# Altium PCB Coil_v3r1.PcbDoc (part 3 of 5)
Units mm, origin at the board's own origin, x right, y up, seen from the top; angles counter-clockwise.
Board outline 72 x 72 mm, 4 copper layers (Top Layer, Signal Layer 1, Signal Layer 2, Bottom Layer), stack 0.778 mm thick; 2 components, 0 nets, 15 pads, 374 vias.
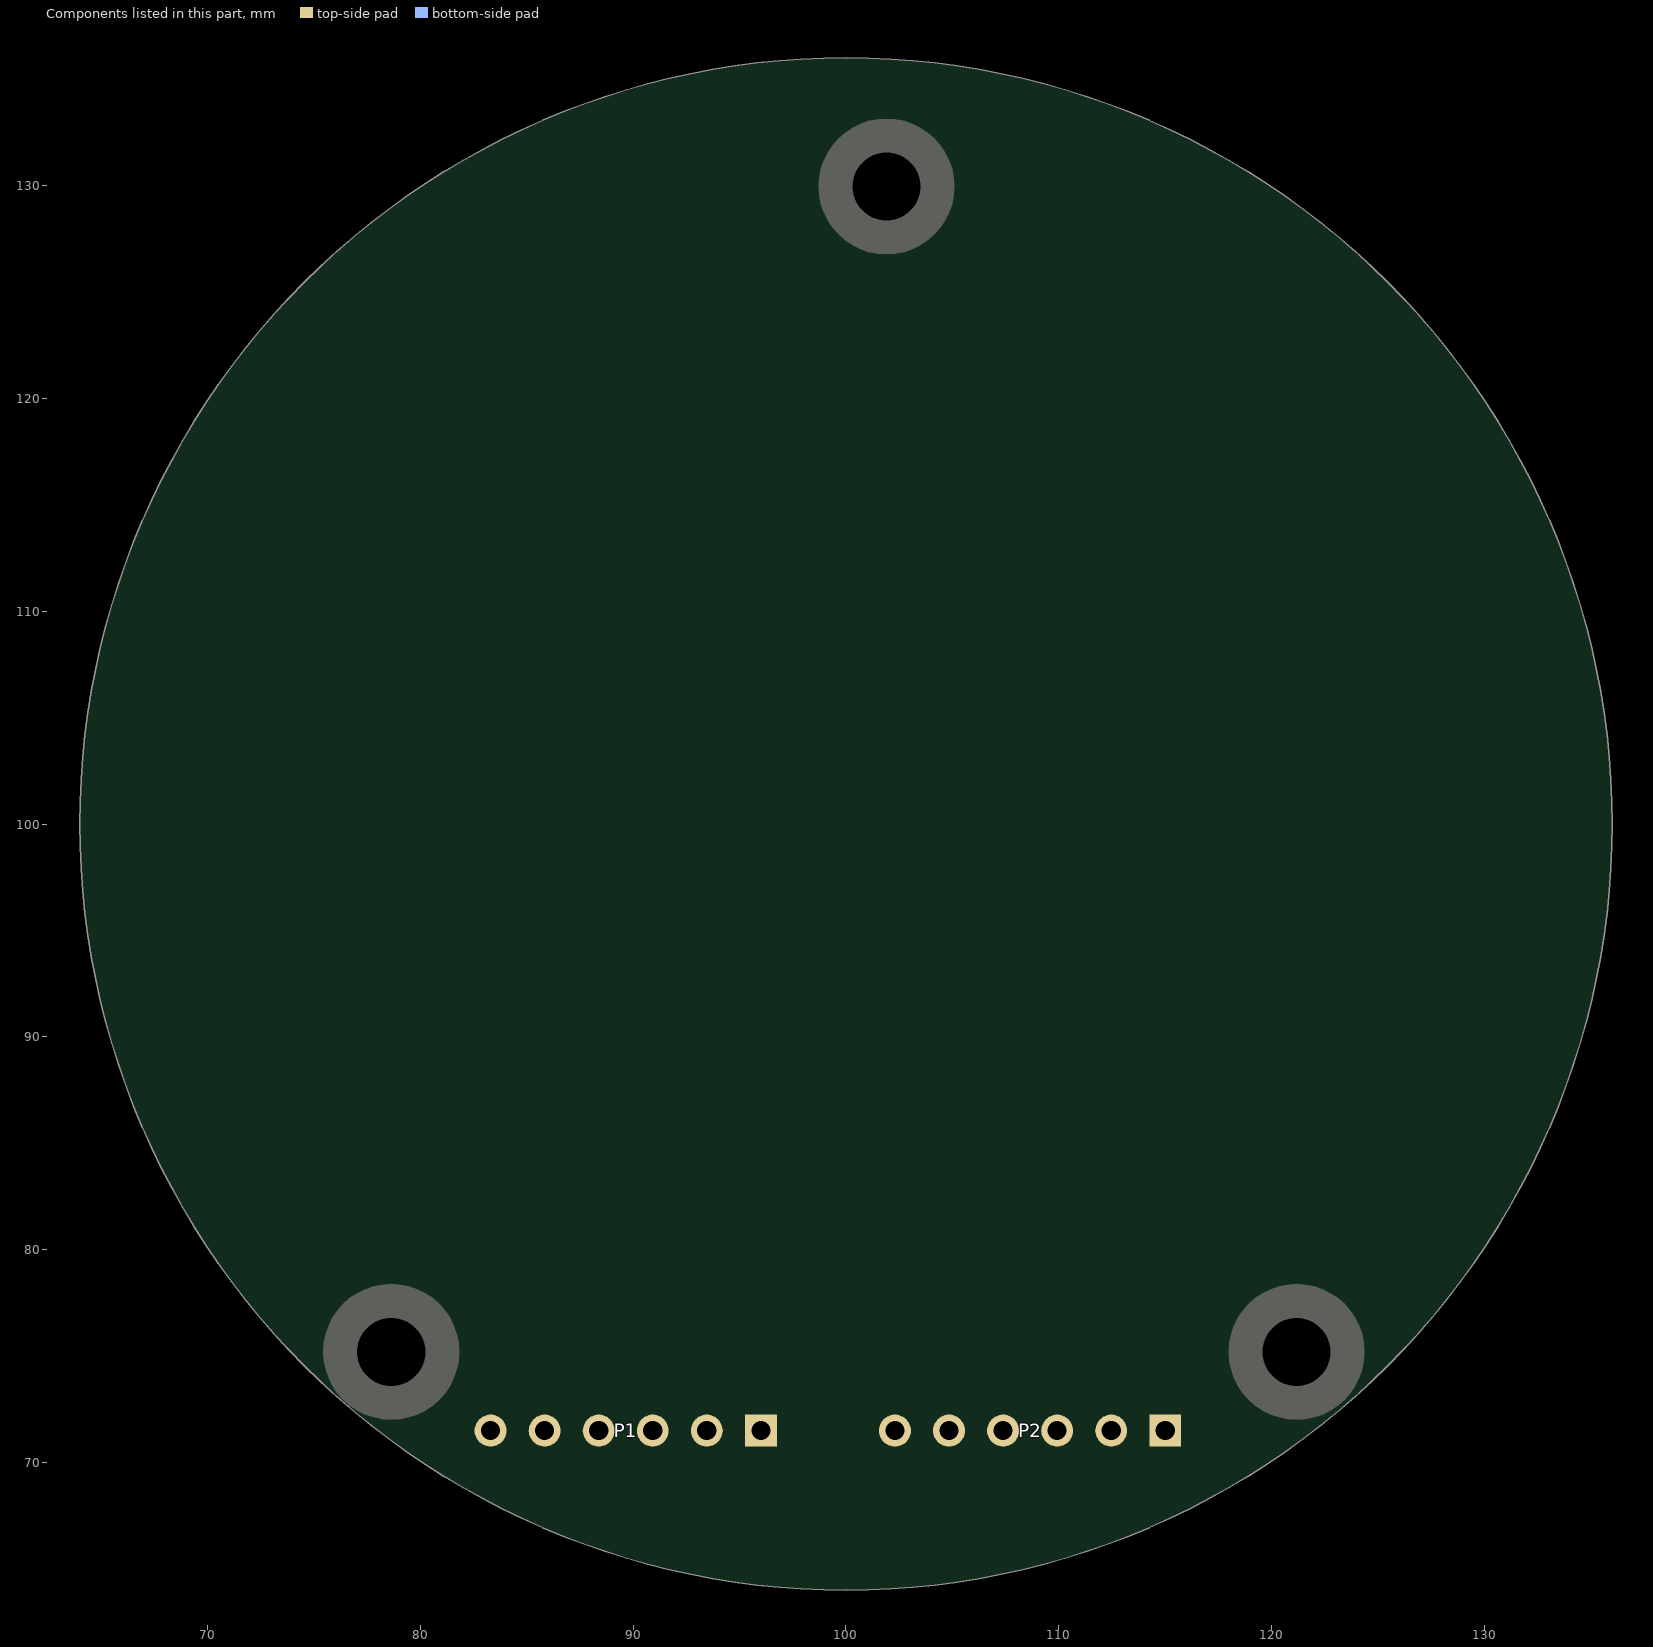
[diagram p5: the components of this part, seen from the top]

## Via types
v1: diameter 0.406, hole 0.305, Top Layer to Bottom Layer, 374 vias

## Nets (pads, with @x,y where several pads share a name; then routed paths per layer and width w, separated by ;. In a path a pad name is that pad's centre, name@x,y a point inside that pad or via, vN(x,y) a via of type N, cw(c..) or ccw(c..) an arc to the next point about the centre after c; other vN are vias at no path point) (continued)
copper on no net: (continued)
  Signal Layer 1 w0.1: v1(107.244,101.941) 107.247,101.996 107.282,102.061 107.349,102.135 107.446,102.22 107.573,102.315 107.726,102.421 107.905,102.538 108.107,102.665 108.329,102.803 108.569,102.95 108.823,103.107 109.088,103.272 109.362,103.444 109.64,103.623 109.919,103.808 110.197,103.996 110.468,104.187 110.731,104.379 110.983,104.572 111.219,104.762 111.437,104.949 111.635,105.131 111.81,105.307 111.959,105.475 112.082,105.634 112.177,105.782 112.242,105.918 112.276,106.041 112.279,106.149 v1(112.251,106.242) ; v1(107.408,98.827) 107.433,98.876 107.491,98.921 107.582,98.961 107.705,98.999 107.86,99.035 108.043,99.069 108.254,99.103 108.49,99.138 108.749,99.173 109.028,99.21 109.324,99.25 109.633,99.293 109.953,99.339 110.28,99.389 110.61,99.444 110.94,99.503 111.266,99.567 111.585,99.636 111.893,99.709 112.186,99.787 112.461,99.87 112.716,99.956 112.947,100.045 113.152,100.138 113.329,100.233 113.476,100.329 113.59,100.427 113.672,100.525 113.719,100.623 v1(113.731,100.72) ; v1(107.408,101.173) 107.416,101.228 107.458,101.288 107.532,101.355 107.638,101.429 107.773,101.511 107.937,101.6 108.127,101.698 108.341,101.803 108.577,101.917 108.83,102.039 109.099,102.168 109.38,102.304 109.67,102.447 109.966,102.596 110.263,102.75 110.558,102.908 110.849,103.07 111.13,103.234 111.4,103.399 111.655,103.563 111.892,103.727 112.107,103.887 112.3,104.044 112.466,104.195 112.605,104.34 112.714,104.477 112.793,104.606 112.84,104.724 112.855,104.832 v1(112.837,104.928) ; v1(107.482,84.18) 107.593,84.214 107.72,84.216 107.862,84.189 108.02,84.133 108.193,84.049 108.383,83.94 108.587,83.808 108.806,83.654 109.039,83.482 109.284,83.294 109.541,83.093 109.808,82.882 110.084,82.665 110.367,82.444 110.655,82.224 110.946,82.006 111.239,81.794 111.531,81.592 111.82,81.402 112.105,81.226 112.382,81.069 112.651,80.932 112.909,80.817 113.154,80.727 113.384,80.662 113.598,80.625 113.795,80.615 113.973,80.635 114.13,80.684 v1(114.267,80.763) ; v1(107.49,99.607) 107.509,99.659 107.563,99.709 107.649,99.76 107.768,99.81 107.917,99.862 108.096,99.915 108.303,99.971 108.534,100.03 108.788,100.092 109.061,100.158 109.351,100.229 109.655,100.303 109.968,100.383 110.288,100.467 110.61,100.556 110.932,100.65 111.25,100.747 111.56,100.849 111.858,100.954 112.141,101.062 112.407,101.173 112.651,101.285 112.872,101.398 113.066,101.512 113.232,101.625 113.368,101.736 113.471,101.845 113.542,101.951 113.578,102.054 v1(113.581,102.151) ; v1(107.49,100.393) 107.504,100.446 107.552,100.502 107.632,100.56 107.745,100.623 107.889,100.69 108.061,100.762 108.26,100.839 108.484,100.922 108.73,101.01 108.995,101.104 109.276,101.205 109.57,101.311 109.873,101.423 110.183,101.54 110.494,101.662 110.805,101.789 111.11,101.919 111.407,102.053 111.693,102.188 111.964,102.325 112.216,102.463 112.447,102.6 112.655,102.736 112.836,102.869 112.99,102.999 113.113,103.124 113.205,103.243 113.264,103.356 113.289,103.462 v1(113.281,103.559) ; v1(108.069,122.55) 108.21,122.48 108.338,122.376 108.454,122.24 108.555,122.071 108.643,121.872 108.717,121.645 108.778,121.39 108.826,121.112 108.861,120.813 108.885,120.495 108.897,120.161 108.9,119.815 108.894,119.459 108.88,119.098 108.861,118.735 108.837,118.373 108.811,118.015 108.784,117.665 108.757,117.326 108.733,117.001 108.713,116.692 108.699,116.403 108.693,116.136 108.696,115.892 108.711,115.674 108.738,115.483 108.779,115.321 108.835,115.188 108.907,115.084 v1(108.997,115.01) ; v1(108.997,84.99) 109.104,85.034 109.23,85.049 109.374,85.036 109.536,84.995 109.717,84.929 109.916,84.839 110.133,84.727 110.366,84.596 110.614,84.447 110.877,84.284 111.152,84.11 111.439,83.926 111.735,83.737 112.038,83.545 112.346,83.354 112.657,83.165 112.969,82.983 113.28,82.81 113.586,82.65 113.886,82.503 114.178,82.374 114.459,82.264 114.727,82.175 114.979,82.109 115.215,82.067 115.432,82.051 115.629,82.061 115.804,82.098 115.956,82.163 v1(116.084,82.254) ; v1(110.24,121.651) 110.374,121.567 110.492,121.451 110.593,121.304 110.677,121.126 110.745,120.92 110.797,120.686 110.833,120.427 110.853,120.146 110.859,119.844 110.851,119.525 110.83,119.192 110.799,118.847 110.758,118.494 110.71,118.136 110.655,117.776 110.596,117.418 110.534,117.065 110.473,116.719 110.413,116.384 110.357,116.063 110.307,115.758 110.265,115.472 110.233,115.206 110.212,114.963 110.205,114.745 110.213,114.552 110.238,114.387 110.281,114.249 110.343,114.138 v1(110.425,114.056) ; v1(110.425,85.944) 110.527,85.998 110.651,86.025 110.795,86.026 110.961,86.002 111.148,85.954 111.355,85.884 111.581,85.794 111.826,85.686 112.088,85.563 112.365,85.426 112.656,85.279 112.959,85.125 113.272,84.966 113.593,84.804 113.918,84.644 114.246,84.487 114.575,84.336 114.901,84.195 115.221,84.065 115.534,83.949 115.837,83.849 116.128,83.766 116.403,83.704 116.661,83.663 116.9,83.645 117.117,83.65 117.312,83.679 117.482,83.733 117.627,83.812 v1(117.746,83.916) ; v1(111.752,87.033) 111.849,87.098 111.969,87.137 112.113,87.152 112.28,87.144 112.471,87.114 112.684,87.065 112.918,86.998 113.172,86.914 113.444,86.817 113.734,86.708 114.038,86.591 114.355,86.467 114.682,86.339 115.016,86.21 115.356,86.082 115.698,85.958 116.04,85.84 116.378,85.731 116.71,85.634 117.033,85.549 117.344,85.479 117.641,85.425 117.921,85.39 118.182,85.375 118.421,85.38 118.637,85.406 118.828,85.455 118.992,85.525 119.129,85.618 v1(119.237,85.733) ; v1(111.752,112.967) 111.679,113.056 111.628,113.172 111.599,113.314 111.591,113.481 111.601,113.674 111.63,113.89 111.674,114.13 111.732,114.391 111.802,114.672 111.881,114.971 111.969,115.285 112.061,115.612 112.156,115.95 112.252,116.296 112.346,116.646 112.436,116.999 112.519,117.35 112.594,117.698 112.659,118.038 112.712,118.367 112.751,118.684 112.775,118.985 112.783,119.267 112.773,119.528 112.744,119.766 112.697,119.978 112.63,120.163 112.544,120.32 112.438,120.446 v1(112.313,120.543) ; v1(112.967,88.248) 113.056,88.321 113.172,88.372 113.314,88.401 113.481,88.409 113.674,88.399 113.89,88.37 114.13,88.326 114.391,88.268 114.672,88.198 114.971,88.119 115.285,88.031 115.612,87.939 115.95,87.844 116.296,87.748 116.646,87.654 116.999,87.564 117.35,87.481 117.698,87.406 118.038,87.341 118.367,87.288 118.684,87.249 118.985,87.225 119.267,87.217 119.528,87.227 119.766,87.256 119.978,87.303 120.163,87.37 120.32,87.456 120.446,87.562 v1(120.543,87.687) ; v1(112.967,111.752) 112.902,111.849 112.863,111.969 112.848,112.113 112.856,112.28 112.886,112.471 112.935,112.684 113.002,112.918 113.086,113.172 113.183,113.444 113.292,113.734 113.409,114.038 113.533,114.355 113.661,114.682 113.79,115.016 113.918,115.356 114.042,115.698 114.16,116.04 114.269,116.378 114.366,116.71 114.451,117.033 114.521,117.344 114.575,117.641 114.61,117.921 114.625,118.182 114.62,118.421 114.594,118.637 114.545,118.828 114.475,118.992 114.382,119.129 v1(114.267,119.237) ; v1(114.056,89.575) 114.138,89.657 114.249,89.719 114.387,89.762 114.552,89.787 114.745,89.795 114.963,89.788 115.206,89.767 115.472,89.735 115.758,89.693 116.063,89.643 116.384,89.587 116.719,89.527 117.065,89.466 117.418,89.404 117.776,89.345 118.136,89.29 118.494,89.242 118.847,89.201 119.192,89.17 119.525,89.149 119.844,89.141 120.146,89.147 120.427,89.167 120.686,89.203 120.92,89.255 121.126,89.323 121.304,89.407 121.451,89.508 121.567,89.626 v1(121.651,89.76) ; v1(114.056,110.425) 114.002,110.527 113.975,110.651 113.974,110.795 113.998,110.961 114.046,111.148 114.116,111.355 114.206,111.581 114.314,111.826 114.437,112.088 114.574,112.365 114.721,112.656 114.875,112.959 115.034,113.272 115.196,113.593 115.356,113.918 115.513,114.246 115.664,114.575 115.805,114.901 115.935,115.221 116.051,115.534 116.151,115.837 116.234,116.128 116.296,116.403 116.337,116.661 116.355,116.9 116.35,117.117 116.321,117.312 116.267,117.482 116.188,117.627 v1(116.084,117.746) ; v1(115.01,91.003) 115.084,91.093 115.188,91.165 115.321,91.221 115.483,91.262 115.674,91.289 115.892,91.304 116.136,91.307 116.403,91.301 116.692,91.287 117.001,91.267 117.326,91.243 117.665,91.216 118.015,91.189 118.373,91.163 118.735,91.139 119.098,91.12 119.459,91.106 119.815,91.1 120.161,91.103 120.495,91.115 120.813,91.139 121.112,91.174 121.39,91.222 121.645,91.283 121.872,91.357 122.071,91.445 122.24,91.546 122.376,91.662 122.48,91.79 v1(122.55,91.931) ; v1(115.01,108.997) 114.966,109.104 114.951,109.23 114.964,109.374 115.005,109.536 115.071,109.717 115.161,109.916 115.273,110.133 115.404,110.366 115.553,110.614 115.716,110.877 115.89,111.152 116.074,111.439 116.263,111.735 116.455,112.038 116.646,112.346 116.835,112.657 117.017,112.969 117.19,113.28 117.35,113.586 117.497,113.886 117.626,114.178 117.736,114.459 117.825,114.727 117.891,114.979 117.933,115.215 117.949,115.432 117.939,115.629 117.902,115.804 117.837,115.956 v1(117.746,116.084) ; v1(115.82,92.518) 115.884,92.614 115.98,92.696 116.108,92.765 116.265,92.822 116.453,92.868 116.668,92.903 116.91,92.931 117.177,92.951 117.466,92.965 117.775,92.976 118.101,92.984 118.441,92.99 118.792,92.997 119.151,93.006 119.513,93.018 119.877,93.034 120.237,93.056 120.592,93.085 120.936,93.122 121.267,93.167 121.581,93.221 121.876,93.286 122.148,93.361 122.395,93.446 122.614,93.542 122.803,93.649 122.961,93.767 123.086,93.895 123.177,94.033 v1(123.232,94.181) ; v1(115.82,107.482) 115.786,107.593 115.784,107.72 115.811,107.862 115.867,108.02 115.951,108.193 116.06,108.383 116.192,108.587 116.346,108.806 116.518,109.039 116.706,109.284 116.907,109.541 117.118,109.808 117.335,110.084 117.556,110.367 117.776,110.655 117.994,110.946 118.206,111.239 118.408,111.531 118.598,111.82 118.774,112.105 118.931,112.382 119.068,112.651 119.183,112.909 119.273,113.154 119.338,113.384 119.375,113.598 119.385,113.795 119.365,113.973 119.316,114.13 v1(119.237,114.267) ; v1(116.477,94.104) 116.532,94.207 116.619,94.298 116.739,94.379 116.891,94.451 117.072,94.515 117.283,94.571 117.522,94.622 117.785,94.668 118.071,94.711 118.378,94.752 118.702,94.792 119.039,94.832 119.388,94.873 119.744,94.917 120.104,94.964 120.464,95.016 120.821,95.073 121.17,95.137 121.509,95.207 121.834,95.284 122.142,95.369 122.429,95.462 122.692,95.563 122.929,95.673 123.138,95.79 123.316,95.915 123.462,96.048 123.573,96.187 123.65,96.334 v1(123.691,96.486) ; v1(116.477,105.896) 116.455,106.009 116.464,106.135 116.506,106.274 116.577,106.426 116.677,106.59 116.804,106.768 116.956,106.959 117.13,107.161 117.325,107.376 117.536,107.602 117.761,107.838 117.996,108.083 118.24,108.336 118.487,108.596 118.735,108.861 118.981,109.13 119.22,109.4 119.45,109.671 119.668,109.94 119.87,110.206 120.053,110.467 120.216,110.721 120.356,110.966 120.47,111.201 120.557,111.424 120.615,111.634 120.643,111.829 120.641,112.007 120.608,112.169 v1(120.543,112.313) ; v1(116.976,95.748) 117.02,95.855 117.098,95.954 117.21,96.047 117.353,96.133 117.528,96.214 117.732,96.291 117.964,96.366 118.222,96.437 118.503,96.508 118.804,96.579 119.122,96.65 119.454,96.723 119.797,96.798 120.147,96.877 120.501,96.959 120.854,97.046 121.203,97.138 121.545,97.235 121.875,97.338 122.191,97.447 122.489,97.562 122.765,97.683 123.018,97.809 123.243,97.941 123.439,98.078 123.604,98.22 123.736,98.366 123.833,98.516 123.895,98.669 v1(123.921,98.825) ; v1(116.976,104.252) 116.964,104.368 116.987,104.492 117.041,104.626 117.127,104.77 117.243,104.924 117.387,105.088 117.556,105.263 117.75,105.448 117.964,105.643 118.196,105.847 118.443,106.059 118.702,106.28 118.969,106.508 119.241,106.743 119.513,106.982 119.784,107.225 120.049,107.471 120.304,107.718 120.547,107.965 120.774,108.209 120.983,108.451 121.17,108.688 121.333,108.918 121.469,109.141 121.578,109.354 121.656,109.557 121.703,109.748 121.719,109.926 121.701,110.091 v1(121.651,110.24) ; v1(117.311,97.432) 117.345,97.543 117.413,97.65 117.514,97.752 117.649,97.853 117.815,97.951 118.01,98.047 118.234,98.144 118.484,98.241 118.756,98.338 119.049,98.438 119.358,98.54 119.682,98.645 120.016,98.754 120.356,98.866 120.7,98.983 121.043,99.104 121.382,99.23 121.712,99.36 122.031,99.495 122.335,99.635 122.62,99.778 122.883,99.925 123.122,100.076 123.333,100.229 123.515,100.385 123.665,100.542 123.782,100.701 123.864,100.859 123.911,101.018 v1(123.921,101.175) ; v1(117.311,102.568) 117.311,102.684 117.345,102.805 117.412,102.933 117.512,103.068 117.642,103.21 117.802,103.36 117.988,103.517 118.198,103.682 118.431,103.855 118.682,104.035 118.949,104.222 119.228,104.417 119.516,104.618 119.809,104.824 120.104,105.036 120.397,105.251 120.684,105.47 120.963,105.691 121.229,105.912 121.479,106.134 121.71,106.354 121.919,106.571 122.104,106.784 122.262,106.992 122.391,107.194 122.489,107.388 122.554,107.574 122.587,107.75 122.586,107.915 v1(122.55,108.069) ; v1(117.479,99.141) 117.502,99.255 117.559,99.368 117.65,99.48 117.774,99.593 117.93,99.707 118.115,99.822 118.328,99.94 118.567,100.061 118.828,100.185 119.11,100.313 119.408,100.445 119.72,100.581 120.041,100.722 120.369,100.867 120.7,101.017 121.03,101.171 121.354,101.329 121.67,101.492 121.974,101.657 122.263,101.825 122.532,101.996 122.78,102.168 123.003,102.342 123.198,102.515 123.364,102.688 123.498,102.859 123.599,103.028 123.665,103.194 123.696,103.357 v1(123.691,103.514) ; v1(117.479,100.859) 117.491,100.974 117.537,101.092 117.616,101.213 117.728,101.337 117.872,101.465 118.045,101.599 118.246,101.737 118.472,101.88 118.72,102.029 118.987,102.184 119.271,102.345 119.568,102.511 119.874,102.683 120.186,102.859 120.501,103.041 120.813,103.227 121.121,103.416 121.42,103.608 121.706,103.803 121.977,103.999 122.228,104.195 122.458,104.391 122.662,104.585 122.84,104.777 122.988,104.965 123.104,105.149 123.188,105.327 123.238,105.499 123.253,105.663 v1(123.232,105.819)